# EAGLE board PROIECT_OPEN_READER v77 (EAGLE 9.7.0)
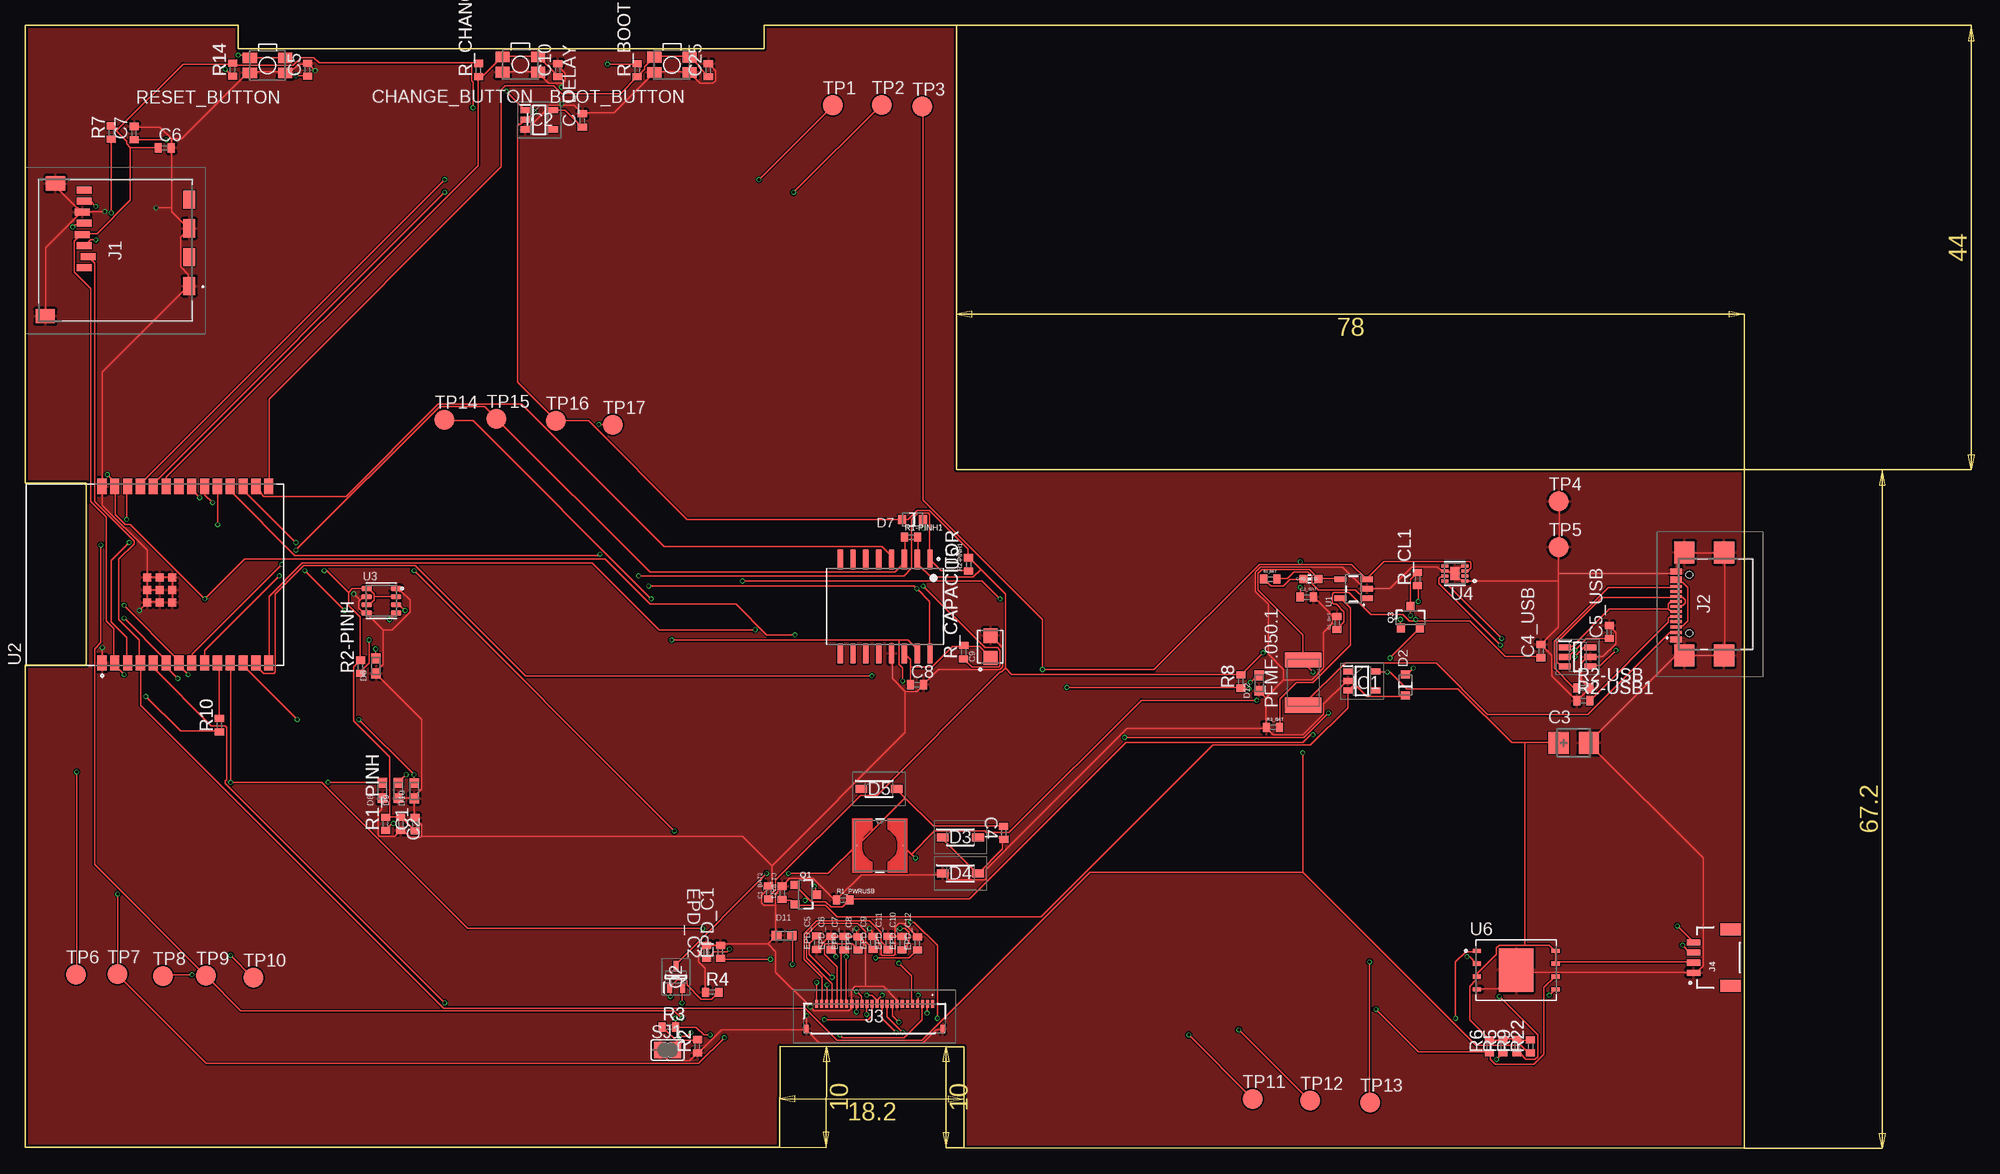
[diagram p0: board, top side]
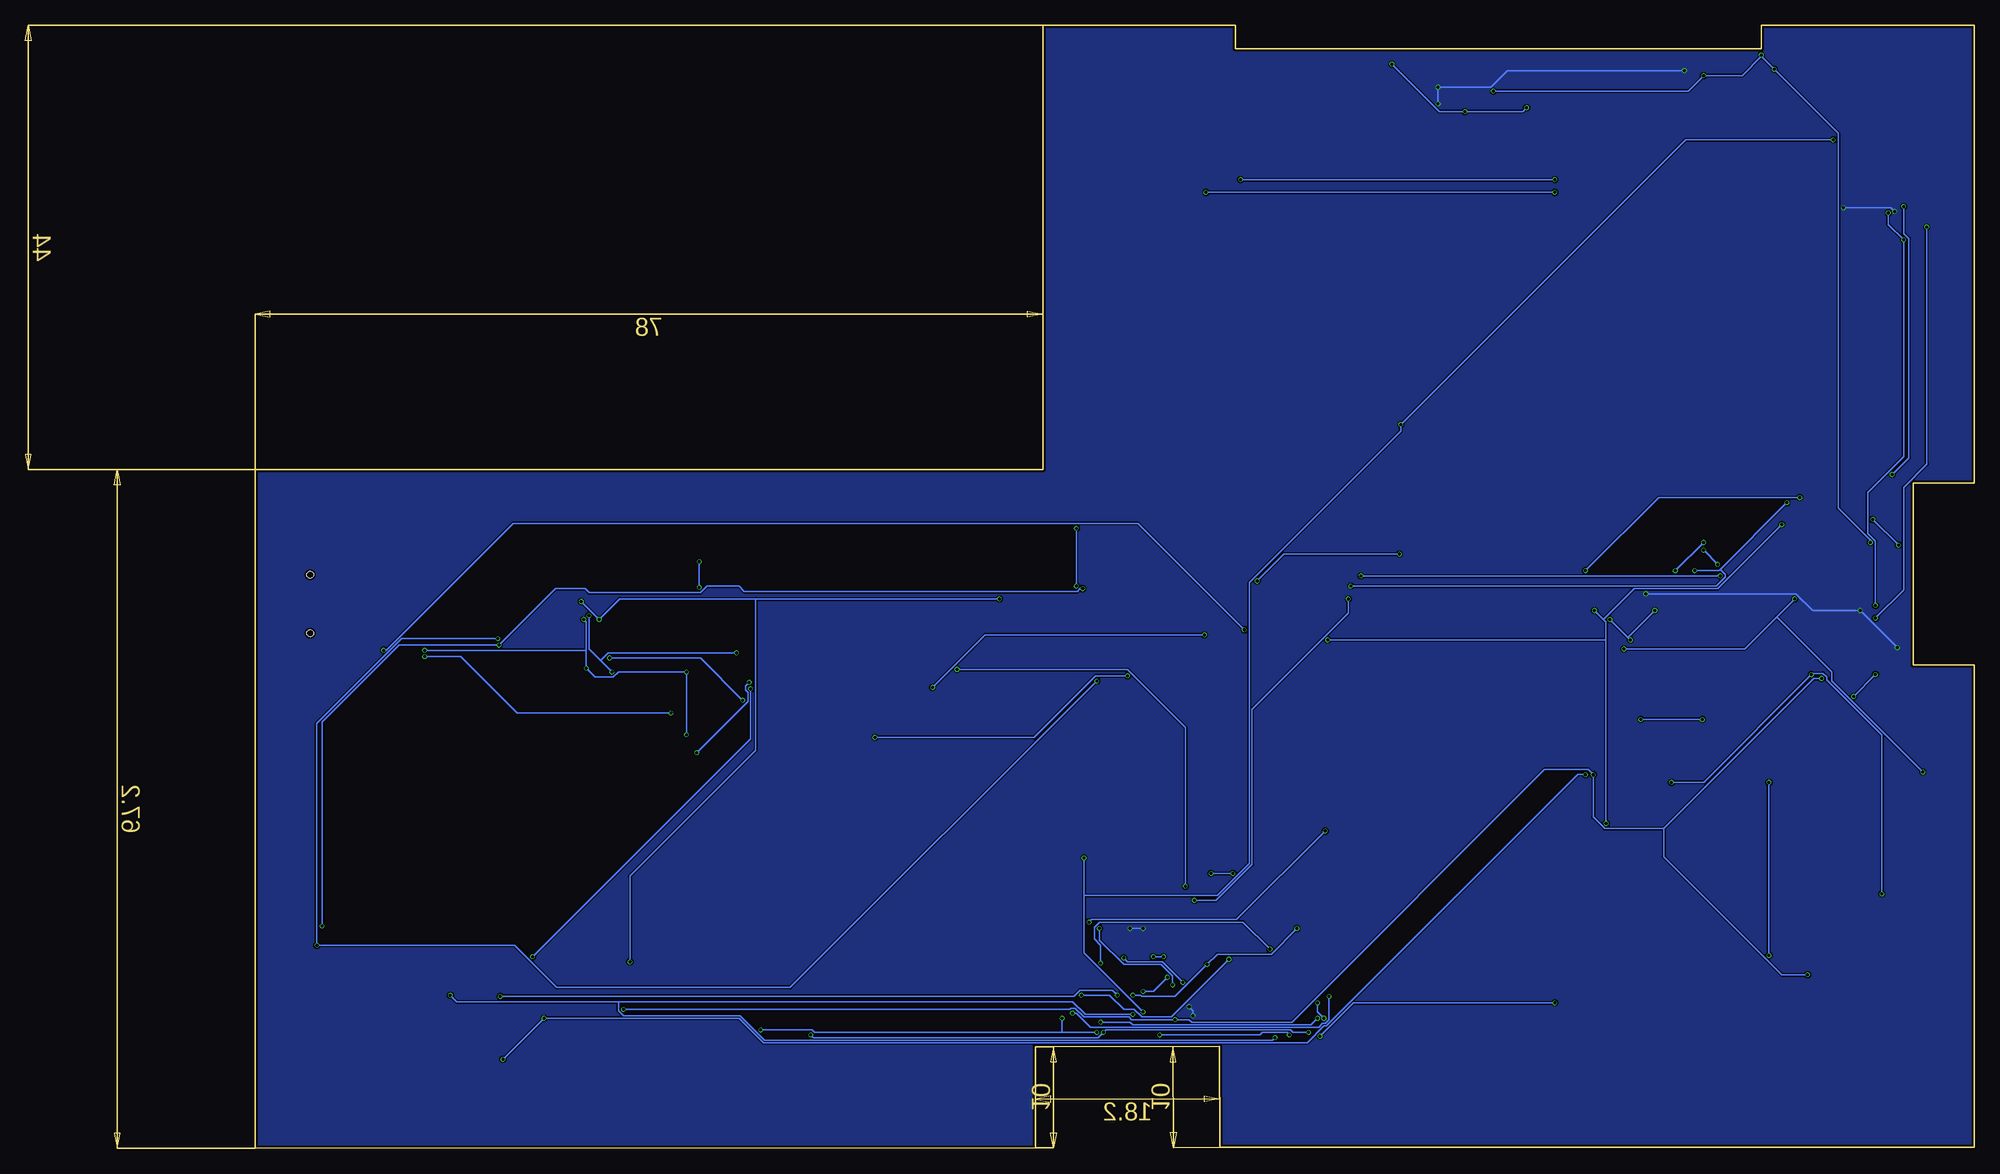
[diagram p1: board, bottom side, seen from below]

Size 170.22 x 111.22 mm. Coordinates in mm from the lower left corner, seen from the top.
Outline: 92.94,10.06 74.73,10.1 74.69,0.1 0.01,0.1 0.01,47.89 6.05,47.89 6.05,65.91 0,65.91 0,111.22 21.06,111.22 21.06,108.88 73.16,108.88 73.16,111.2 92.22,111.2 92.22,67.2 170.22,67.2 170.22,0 92.94,0.06 92.94,10.06
Copper layers (1*16): Top 0.035mm / dielectric 1.6mm / Bottom 0.035mm
Design rules "jlcpcb-2layers.dru": minimum track width 5mil, minimum drill 0.3mm, track to track 5mil, track to pad 5mil, pad to pad 5mil, via to via 5mil, smd to smd 5mil, copper to edge 0.2mm, drill to drill 6mil, minimum pad ring 10mil, minimum via ring 3mil, stop-mask expansion 4mil, vias tented up to drill 0mil, thermal gap 10mil

## Footprints (pad centres in the part's own frame; a part is rotated, then mirrored left to right if it is on the bottom)
MYBUTTON = smd 1.4 x 1.05: 1 1.75,0.75; 2 -1.75,0.75; 3 -1.75,-0.75; 4 1.75,-0.75
EAGLE-LTSPICE_C0402 = smd 0.7 x 0.9: 1 -0.65,0; 2 0.65,0
RCL_CT3528 = smd 2 x 2.2: + -1.5,0; - 1.5,0
CAPCP3225X100N = smd 1.4 x 1.4: 1 -1.1,0; 2 1.1,0
ADAFRUIT_CHIP-LED0603 = smd 0.8 x 0.8: A 0,-0.75; C 0,0.75
SOT95P280X145-6N = smd 1.2 x 0.6: 1 -1.25,0.95; 2 -1.25,0; 3 -1.25,-0.95; 4 1.25,-0.95; 5 1.25,0; 6 1.25,0.95
ESP32_WROVER_AVX---SD0805S020S1R0_AVX_SD0805S020S1R0_0 = smd 0.8 x 0.9: 1 -1.05,0; 2 1.05,0
SOD3716X135N = smd 1.15 x 0.8: 1 -1.75,0; 2 1.75,0
DIOC1608X36N = smd 0.97 x 0.94: 1 -0.75,0; 2 0.75,0
SOT95P280X120-5N = smd 0.9 x 0.6: 1 -1.4,0.95; 2 -1.4,0; 3 -1.4,-0.95; 4 1.4,-0.95; 5 1.4,0.95
SOT95P280X125-5N = smd 0.9 x 0.6: 1 -1.4,0.95; 2 -1.4,0; 3 -1.4,-0.95; 4 1.4,-0.95; 5 1.4,0.95
112ATAARR03ATTEND = smd 1.8 x 1.2: G1 10.6,10.4; G2 4.9,10.4; S1 7.75,10.4; S2 2.05,10.4 | smd 1.4 x 1.9: G3 13.6,-3.85; G4 0.45,-2.85 | smd 0.7 x 1.5: P1 8.8,0; P2 7.7,0.4; P3 6.6,0; P4 5.5,-0.2; P5 4.4,0; P6 3.3,-0.2; P7 2.2,0; P8 1.1,0
SAMACSYS_PARTS_USB4110GFA = smd 0.3 x 1.15: A1 -3.66,3.898; A4 -2.79,3.908; A5 -1.24,3.898; A6 -0.24,3.898; A7 0.26,3.898; A8 1.26,3.898; A9 2.56,3.898; A12 3.36,3.898; B1 3.06,3.898; B4 2.26,3.898; B5 1.76,3.898; B6 0.76,3.898; B7 -0.74,3.898; B8 -1.74,3.898; B9 -2.26,3.898; B12 -3.35,3.898 | smd 2.18 x 2: MP1 -5.11,-0.827; MP2 5.11,-0.827; MP3 -5.11,3.103; MP4 5.11,3.103 | hole 0.65: -2.89,2.603; 2.89,2.603
FH34SRJ24S05SH99 = smd 0.3 x 0.8: 1 5.75,1.45; 2 5.25,1.45; 3 4.75,1.45; 4 4.25,1.45; 5 3.75,1.45; 6 3.25,1.45; 7 2.75,1.45; 8 2.25,1.45; 9 1.75,1.45; 10 1.25,1.45; 11 0.75,1.45; 12 0.25,1.45; 13 -0.25,1.45; 14 -0.75,1.45; 15 -1.25,1.45; 16 -1.75,1.45; 17 -2.25,1.45; 18 -2.75,1.45; 19 -3.25,1.45; 20 -3.75,1.45; 21 -4.25,1.45; 22 -4.75,1.45; 23 -5.25,1.45; 24 -5.75,1.45 | smd 0.4 x 0.8: MP1 6.75,-1.05; MP2 -6.75,-1.05
JST04_1MM_RA = smd 0.6 x 1.35: 1 -1.5,0; 2 -0.5,0; 3 0.5,0; 4 1.5,0 | smd 1.2 x 2: NC1 2.8,-3.675; NC2 -2.8,-3.675
IND_4828-WE-TPC_WRE = smd 0.127 x 0.127: 1 -2.286,0; 2 2.286,0
ESP32C6_VARISTOR_CT/CN1812 = smd 1.5 x 3.6: 1 -2.25,0; 2 2.25,0
ESP32_WROVER_SPARKFUN-DISCRETESEMI_SOT23-3 = smd 0.8 x 0.9: 1 -0.95,-1; 2 0.95,-1; 3 0,1.1
SOT65P210X110-3N = smd 1.05 x 0.5: 1 -1.05,0.65; 2 -1.05,-0.65; 3 1.05,0
ESP32_WROVER_EAGLE-LTSPICE_R0402 = smd 0.7 x 0.9: 1 -0.65,0; 2 0.65,0
SJ = smd 1.168 x 1.6: 1 -0.762,0; 2 0.762,0
TP20R = smd 2 x 2: TP 0,0
ESP32_WROVER_SPARKFUN-IC-POWER_SOT23-5 = smd 0.55 x 1.2: 1 -0.95,-1.3; 2 0,-1.3; 3 0.95,-1.3; 4 0.95,1.3; 5 -0.95,1.3
XCVR_ESP32-C6-WROOM-1-N8 = smd 1.5 x 0.9: 1 -8.75,5.26; 2 -8.75,3.99; 3 -8.75,2.72; 4 -8.75,1.45; 5 -8.75,0.18; 6 -8.75,-1.09; 7 -8.75,-2.36; 8 -8.75,-3.63; 9 -8.75,-4.9; 10 -8.75,-6.17; 11 -8.75,-7.44; 12 -8.75,-8.71; 13 -8.75,-9.98; 14 -8.75,-11.25; 15 8.75,-11.25; 16 8.75,-9.98; 17 8.75,-8.71; 18 8.75,-7.44; 19 8.75,-6.17; 20 8.75,-4.9; 21 8.75,-3.63; 22 8.75,-2.36; 23 8.75,-1.09; 24 8.75,0.18; 25 8.75,1.45; 26 8.75,2.72; 27 8.75,3.99; 28 8.75,5.26 | smd 0.8 x 0.8: 29_1 -2.755,0.79; 29_2 -1.505,0.79; 29_3 -0.255,0.79; 29_4 -2.755,-0.46; 29_5 -1.505,-0.46; 29_6 -0.255,-0.46; 29_7 -2.755,-1.71; 29_8 -1.505,-1.71; 29_9 -0.255,-1.71
ESP32_WROVER_BME680_PSON80P300X300X100-8N = smd 1.016 x 0.5: 1 1.458,1.2; 2 1.458,0.4; 3 1.458,-0.4; 4 1.458,-1.2; 5 -1.458,-1.22; 6 -1.458,-0.4; 7 -1.458,0.4; 8 -1.458,1.2
SON50P200X200X80-9N = smd 0.76 x 0.27: 1 -0.985,0.75; 2 -0.985,0.25; 3 -0.985,-0.25; 4 -0.985,-0.75; 5 0.985,-0.75; 6 0.985,-0.25; 7 0.985,0.25; 8 0.985,0.75 | smd 0.9 x 1.3: 9 0,0
SOIC127P1032X265-16N = smd 2.05 x 0.59: 1 -4.655,4.445; 2 -4.655,3.175; 3 -4.655,1.905; 4 -4.655,0.635; 5 -4.655,-0.635; 6 -4.655,-1.905; 7 -4.655,-3.175; 8 -4.655,-4.445; 9 4.655,-4.445; 10 4.655,-3.175; 11 4.655,-1.905; 12 4.655,-0.635; 13 4.655,0.635; 14 4.655,1.905; 15 4.655,3.175; 16 4.655,4.445
SON127P600X800X80-9N = smd 0.94 x 0.44: 1 -3.895,1.905; 2 -3.895,0.635; 3 -3.895,-0.635; 4 -3.895,-1.905; 5 3.895,-1.905; 6 3.895,-0.635; 7 3.895,0.635; 8 3.895,1.905 | smd 3.4 x 4.3: 9 0,0

## Placement (x,y rotation side)
BOOT_BUTTON  BUTTON_CUSYOMV1  [MYBUTTON]  64.03,107.31 180 top
C1  [EAGLE-LTSPICE_C0402]  38.59,32.1 90 top
C1_BAT  4.7uF  [EAGLE-LTSPICE_C0402]  129.87,52.02 90 top
C1_BAT1  [EAGLE-LTSPICE_C0402]  74.94,25.32 90.1 top
C1_BAT2  [EAGLE-LTSPICE_C0402]  73.61,25.34 90 top
C2  [EAGLE-LTSPICE_C0402]  37.18,32.12 270 top
C2_BAT  4.7uF  [EAGLE-LTSPICE_C0402]  126.87,54.59 0 top
C3  [RCL_CT3528]  153.3,40.15 0 top
C4  4.7uF/25V  [EAGLE-LTSPICE_C0402]  96.87,31.25 90.7 top
C4_USB  100nF  [EAGLE-LTSPICE_C0402]  150.06,49.24 90 top
C5  1uF  [EAGLE-LTSPICE_C0402]  27.95,106.8 90 top
C5_USB  4.7uF  [EAGLE-LTSPICE_C0402]  156.82,51.15 90 top
C6  100nF  [EAGLE-LTSPICE_C0402]  13.82,99.07 0 top
C7  10uF  [EAGLE-LTSPICE_C0402]  10.77,100.55 90 top
C8  100nF  [EAGLE-LTSPICE_C0402]  88.3,45.92 0 top
C9  CPH3225A  [CAPCP3225X100N]  95.55,49.67 90 top
C10  100nF  [EAGLE-LTSPICE_C0402]  52.73,106.78 90 top
C25  100nF  [EAGLE-LTSPICE_C0402]  67.63,106.76 90 top
C_DELAY  100nF  [EAGLE-LTSPICE_C0402]  55.16,101.79 90 top
CHANGE_BUTTON  BUTTON_CUSYOMV1  [MYBUTTON]  49.01,107.32 180 top
CHG_LED  [ADAFRUIT_CHIP-LED0603]  127.3,56.37 90 top
D1  USBLC6-2SC6Y  [SOT95P280X145-6N]  153.69,48.67 0 top
D2  ESP32_WROVER_AVX---SD0805S020S1R0_AVX_SD0805S020S1R0_0_0AVX_SD0805S020S1R0_0_0  [ESP32_WROVER_AVX---SD0805S020S1R0_AVX_SD0805S020S1R0_0]  136.64,45.89 90 top
D3  MBR0530  [SOD3716X135N]  92.58,30.81 0 top
D4  MBR0530  [SOD3716X135N]  92.58,27.23 0 top
D5  MBR0530  [SOD3716X135N]  84.53,35.61 0 top
D6  PGB1010603MR  [DIOC1608X36N]  34.72,47.77 90 top
D7  ESP32_WROVER_AVX---SD0805S020S1R0_AVX_SD0805S020S1R0_0_0AVX_SD0805S020S1R0_0_0  [ESP32_WROVER_AVX---SD0805S020S1R0_AVX_SD0805S020S1R0_0]  87.84,62.26 180 top
D8  PGB1010603MR  [DIOC1608X36N]  35.38,35.43 90 top
D9  PGB1010603MR  [DIOC1608X36N]  36.94,35.43 90 top
D10  PGB1010603MR  [DIOC1608X36N]  38.51,35.41 90 top
D11  PGB1010603MR  [DIOC1608X36N]  75.14,21.08 0 top
D12  PGB1010603MR  [DIOC1608X36N]  122.16,46.07 90 top
EPD_C1  1uF/50V  [EAGLE-LTSPICE_C0402]  68.82,19.47 90 top
EPD_C2  1uF/50V  [EAGLE-LTSPICE_C0402]  67.44,19.46 90.4 top
EPD_C5  0.1uF/50V  [EAGLE-LTSPICE_C0402]  78.36,20.38 90 top
EPD_C6  1uF/50V  [EAGLE-LTSPICE_C0402]  79.77,20.34 90 top
EPD_C7  1uF/50V  [EAGLE-LTSPICE_C0402]  81.09,20.33 90 top
EPD_C8  1uF/50V  [EAGLE-LTSPICE_C0402]  82.46,20.31 90 top
EPD_C9  1uF/50V  [EAGLE-LTSPICE_C0402]  83.93,20.36 90 top
EPD_C10  1uF/50V  [EAGLE-LTSPICE_C0402]  86.82,20.33 90 top
EPD_C11  1uF/50V  [EAGLE-LTSPICE_C0402]  85.43,20.34 90 top
EPD_C12  1uF/50V  [EAGLE-LTSPICE_C0402]  88.32,20.3 90 top
IC1  XC6220A331MR-G  [SOT95P280X120-5N]  132.34,46.28 0 top
IC2  BD5229G-TR  [SOT95P280X125-5N]  50.89,101.85 0 top
J1  112A-TAAR-R03_ATTEND  [112ATAARR03ATTEND]  5.83,96 270 top
J2  SAMACSYS_PARTS_USB4110-GF-A  [SAMACSYS_PARTS_USB4110GFA]  167.35,53.9 90 top
J3  FH34SRJ-24S-0.5SH_99_  [FH34SRJ24S05SH99]  84.08,12.87 0 top
J4  QWIIC_RIGHT_ANGLE  [JST04_1MM_RA]  165.17,18.9 90 top
L1  68uH  [IND_4828-WE-TPC_WRE]  84.61,29.98 0 top
PFMF.050.1  [ESP32C6_VARISTOR_CT/CN1812]  126.52,46.13 90 top
Q1  20V/4.2A/52mΩ/1.4W  [ESP32_WROVER_SPARKFUN-DISCRETESEMI_SOT23-3]  77.23,25.13 270 top
Q2  SI1308EDL-T1-GE3  [SOT65P210X110-3N]  64.42,16.98 90 top
Q3  20V/4.2A/52mΩ/1.4W  [ESP32_WROVER_SPARKFUN-DISCRETESEMI_SOT23-3]  137.14,52.55 0 top
R1-PINH1  10K  [ESP32_WROVER_EAGLE-LTSPICE_R0402]  87.71,60.54 0 top
R1_BAT  200  [ESP32_WROVER_EAGLE-LTSPICE_R0402]  123.26,56.38 0 top
R1_PINH  10K  [ESP32_WROVER_EAGLE-LTSPICE_R0402]  35.67,32.13 90 top
R1_PWRUSB  100K  [ESP32_WROVER_EAGLE-LTSPICE_R0402]  80.98,24.61 0 top
R2  2.2  [ESP32_WROVER_EAGLE-LTSPICE_R0402]  66.55,10.13 90 top
R2-PINH  10K  [ESP32_WROVER_EAGLE-LTSPICE_R0402]  33.19,47.69 90 top
R2-PINH1  10K  [ESP32_WROVER_EAGLE-LTSPICE_R0402]  93.39,57.84 90 top
R2-USB  5K1  [ESP32_WROVER_EAGLE-LTSPICE_R0402]  154.27,45.6 0 top
R2-USB1  5k1  [ESP32_WROVER_EAGLE-LTSPICE_R0402]  154.25,44.33 0 top
R2_BAT  2K  [ESP32_WROVER_EAGLE-LTSPICE_R0402]  123.52,41.7 0 top
R3  0.47  [ESP32_WROVER_EAGLE-LTSPICE_R0402]  63.72,12.02 0 top
R4  10K  [ESP32_WROVER_EAGLE-LTSPICE_R0402]  68.02,15.46 0 top
R5  [ESP32_WROVER_EAGLE-LTSPICE_R0402]  146.31,10.13 90 top
R6  [ESP32_WROVER_EAGLE-LTSPICE_R0402]  144.95,10.12 90 top
R7  [ESP32_WROVER_EAGLE-LTSPICE_R0402]  8.53,100.6 90 top
R8  [ESP32_WROVER_EAGLE-LTSPICE_R0402]  120.35,46.22 90 top
R9  [ESP32_WROVER_EAGLE-LTSPICE_R0402]  147.68,10.14 90 top
R10  R1  [ESP32_WROVER_EAGLE-LTSPICE_R0402]  19.23,41.91 90 top
R14  [ESP32_WROVER_EAGLE-LTSPICE_R0402]  20.52,106.81 90 top
R22  [ESP32_WROVER_EAGLE-LTSPICE_R0402]  149.03,10.12 90 top
R_BOOT  10K  [ESP32_WROVER_EAGLE-LTSPICE_R0402]  60.58,106.77 90 top
R_CAPACITOR  15  [ESP32_WROVER_EAGLE-LTSPICE_R0402]  92.91,49.13 89.3 top
R_CHANGE  10K  [ESP32_WROVER_EAGLE-LTSPICE_R0402]  44.87,106.78 90 top
R_CL1  10K  [ESP32_WROVER_EAGLE-LTSPICE_R0402]  137.84,56.39 90 top
RESET_BUTTON  BUTTON_CUSYOMV1  [MYBUTTON]  23.99,107.24 180 top
SJ1  [SJ]  63.6,9.74 0 top
TP1  TPTP20R  [TP20R]  79.96,103.3 0 top
TP2  TPTP20R  [TP20R]  84.79,103.33 0 top
TP3  TPTP20R  [TP20R]  88.82,103.16 0 top
TP4  TPTP20R  [TP20R]  151.82,64.07 0 top
TP5  TPTP20R  [TP20R]  151.82,59.55 0 top
TP6  TPTP20R  [TP20R]  5.04,17.23 0 top
TP7  TPTP20R  [TP20R]  9.12,17.25 0 top
TP8  TPTP20R  [TP20R]  13.61,17.08 0 top
TP9  TPTP20R  [TP20R]  17.9,17.1 0 top
TP10  TPTP20R  [TP20R]  22.58,16.92 0 top
TP11  TPTP20R  [TP20R]  121.51,4.9 0 top
TP12  TPTP20R  [TP20R]  127.22,4.72 0 top
TP13  TPTP20R  [TP20R]  133.14,4.54 0 top
TP14  TPTP20R  [TP20R]  41.52,72.17 0 top
TP15  TPTP20R  [TP20R]  46.66,72.25 0 top
TP16  TPTP20R  [TP20R]  52.54,72.07 0 top
TP17  TPTP20R  [TP20R]  58.17,71.65 0 top
U1  [ESP32_WROVER_SPARKFUN-IC-POWER_SOT23-5]  131.51,55.41 90 top
U2  ESP32-C6-WROOM-1-N8  [XCVR_ESP32-C6-WROOM-1-N8]  12.86,56.81 90 top
U3  ESP32_WROVER_BME680_BME680  [ESP32_WROVER_BME680_PSON80P300X300X100-8N]  35.26,54.23 0 top
U4  MAX17048G+T10  [SON50P200X200X80-9N]  141.55,56.93 180 top
U5  DS3231SN#  [SOIC127P1032X265-16N]  85.13,53.67 270 top
U6  W25Q512JVEIQ  [SON127P600X800X80-9N]  147.61,17.66 0 top

## Library data of the parts
BOOT_BUTTON CHANGE_BUTTON CHG_LED PFMF.050.1 RESET_BUTTON SJ1 TP1-TP17 = DeskAssistant v19 v1
C1 C1_BAT C1_BAT1 C1_BAT2 C2 C2_BAT C4 C4_USB C5 C5_USB C6-C8 C10 C25 C_DELAY EPD_C1 EPD_C2 EPD_C5-EPD_C12 = DeskAssistant v19 v1; SPICEMODEL: NONE; SPICEPREFIX: C
C3 = DeskAssistant v19 v1; SPICEPREFIX: C
C9 = DeskAssistant v19 v1; AVAILABILITY: Not in stock; CHECK_PRICES: https://www.snapeda.com/parts/CPH3225A/Seiko+Instruments/view-part/?ref=eda; DESCRIPTION: 11 mF (EDLC) Supercapacitor 3.3 V 1210 (3225 Metric) - -; MF: Seiko Instruments; MP: CPH3225A; PACKAGE: 1210 Seiko; PRICE: None; PURCHASE-URL: https://www.snapeda.com/api/url_track_click_mouser/?unipart_id=562593&manufacturer=Seiko Instruments&part_name=CPH3225A&search_term=None; SNAPEDA_LINK: https://www.snapeda.com/parts/CPH3225A/Seiko+Instruments/view-part/?ref=snap
D1 = DeskAssistant v19 v1; AVAILABILITY: In Stock; CHECK_PRICES: https://www.snapeda.com/parts/USBLC6-2SC6Y/STMicroelectronics/view-part/?ref=eda; DESCRIPTION: 17V Clamp 5A (8/20µs) Ipp Tvs Diode Surface Mount SOT-23-6; MF: STMicroelectronics; MP: USBLC6-2SC6Y; PACKAGE: SOT-23-6 STMicroelectronics; PRICE: None; SNAPEDA_LINK: https://www.snapeda.com/parts/USBLC6-2SC6Y/STMicroelectronics/view-part/?ref=snap
D2 D7 = DeskAssistant v19 v1; CENTROID_NOT_SPECIFIED: No; DATASHEET: http://datasheets.avx.com/schottky.pdf; DIGIKEY_DESCRIPTION: DIODE SCHOTTKY 20V 1A 0805; DIGIKEY_PART_NUMBER: 478-7800-1-ND; LEAD_FREE: yes; MF: AVX; MOUSER_PART_NUMBER: 581-SD0805S020S1R0; PACKAGE: 0805 (2012 metric); PREFIX: D; ROHS: yes; TEMPERATURE_RANGE_HIGH: +125°C; TEMPERATURE_RANGE_LOW: -55°C
D3-D5 = DeskAssistant v19 v1; AVAILABILITY: In Stock; CHECK_PRICES: https://www.snapeda.com/parts/MBR0530/Onsemi/view-part/?ref=eda; DESCRIPTION: Diode Schottky 30 V 500mA Surface Mount SOD-123; MF: ON Semiconductor; MP: MBR0530; PACKAGE: SOD-123-2 ON Semiconductor; PRICE: None; PURCHASE-URL: https://www.snapeda.com/api/url_track_click_mouser/?unipart_id=179458&manufacturer=ON Semiconductor&part_name=MBR0530&search_term=None; SNAPEDA_LINK: https://www.snapeda.com/parts/MBR0530/Onsemi/view-part/?ref=snap
D6 D8-D12 = DeskAssistant v19 v1; AVAILABILITY: In Stock; CHECK_PRICES: https://www.snapeda.com/parts/PGB1010603MR/Littelfuse/view-part/?ref=eda; DESCRIPTION: 150V (Typ) Clamp - Ipp Tvs Diode Surface Mount 0603 (1608 Metric); MF: Littelfuse Inc.; MP: PGB1010603MR; PACKAGE: 0603 Littelfuse Inc.; PRICE: None; PURCHASE-URL: https://www.snapeda.com/api/url_track_click_mouser/?unipart_id=5659453&manufacturer=Littelfuse Inc.&part_name=PGB1010603MR&search_term=None; SNAPEDA_LINK: https://www.snapeda.com/parts/PGB1010603MR/Littelfuse/view-part/?ref=snap
IC1 = DeskAssistant v19 v1; DESCRIPTION: LDO Voltage Regulators; HEIGHT: 1.2mm; MANUFACTURER_NAME: Torex; MANUFACTURER_PART_NUMBER: XC6220A331MR-G; MOUSER_PART_NUMBER: 865-XC6220A331MR-G; MOUSER_PRICE-STOCK: https://www.mouser.co.uk/ProductDetail/Torex-Semiconductor/XC6220A331MR-G?qs=AsjdqWjXhJ8ZSWznL1J0gg%3D%3D
IC2 = DeskAssistant v19 v1; DESCRIPTION: Voltage Detector with Adjustable Delay Time: CMOS processes are utilized to develop high precision, low current consumption CMOS reset ICs that allow arbitrary setting of the delay time. The extensive lineup includes both Nch Open Drain and CMOS output types in a wide range of detection voltages (from 2.3V to 6.0V, in 0.1V steps), enabling selection of the ideal solution based on customer requirements. In addition, the entire series is of course both lead-free and RoHS-compliant.; HEIGHT: 1.25mm; MANUFACTURER_NAME: ROHM Semiconductor; MANUFACTURER_PART_NUMBER: BD5229G-TR; MOUSER_PART_NUMBER: 755-BD5229G-TR; MOUSER_PRICE-STOCK: https://www.mouser.co.uk/ProductDetail/ROHM-Semiconductor/BD5229G-TR?qs=4kLU8WoGk0vvnhrrYwdszw%3D%3D
J1 = DeskAssistant v19 v1; DESCRIPTION: Micro SD Card Socket, Push-Push Type, Top Mount, SMT, H=1.83mm, 10u; HEIGHT: 1.9mm; MANUFACTURER_NAME: ATTEND; MANUFACTURER_PART_NUMBER: 112A-TAAR-R03 ATTEND
J2 = DeskAssistant v19 v1; DESCRIPTION: CONN USB 2.0 TYPE-C R/A SMT; HEIGHT: 3.26mm; MANUFACTURER_NAME: GCT (GLOBAL CONNECTOR TECHNOLOGY); MANUFACTURER_PART_NUMBER: USB4110-GF-A; MOUSER_PART_NUMBER: 640-USB4110-GF-A; MOUSER_PRICE-STOCK: https://www.mouser.co.uk/ProductDetail/GCT/USB4110-GF-A?qs=KUoIvG%2F9IlYiZvIXQjyJeA%3D%3D
J3 = DeskAssistant v19 v1; DESCRIPTION: 24 Position FFC, FPC Connector Contacts, Top and Bottom 0.020" (0.50mm) Surface Mount, Right Angle; HEIGHT: 1.1mm; MANUFACTURER_NAME: Hirose; MANUFACTURER_PART_NUMBER: FH34SRJ-24S-0.5SH(99); MOUSER_PART_NUMBER: 798-FH34SRJ24S05SH99; MOUSER_PRICE-STOCK: https://www.mouser.co.uk/ProductDetail/Hirose-Connector/FH34SRJ-24S-0.5SH99?qs=vcbW%252B4%252BSTIpKBl5ap9J8Fw%3D%3D
J4 = DeskAssistant v19 v1; PROD_ID: CONN-13694
L1 = DeskAssistant v19 v1; COPYRIGHT: Copyright (C) 2024 Ultra Librarian. All rights reserved.; MANUFACTURER_PART_NUMBER: 744043680; MFR_NAME: Wurth Electronics
Q1 Q3 = DeskAssistant v19 v1; PROD_ID: TRAN-14388
Q2 = DeskAssistant v19 v1; AVAILABILITY: In Stock; CHECK_PRICES: https://www.snapeda.com/parts/SI1308EDL-T1-GE3/Vishay+Siliconix/view-part/?ref=eda; DESCRIPTION: Si1308EDL-T1-GE3 N-channel MOSFET Transistor, 1.5 A, 30 V, 3-Pin SC-70 | Siliconix / Vishay SI1308EDL-T1-GE3; MF: Vishay Siliconix; MP: SI1308EDL-T1-GE3; PACKAGE: SOT-323 Vishay Semiconductor; PRICE: None; PURCHASE-URL: https://www.snapeda.com/api/url_track_click_mouser/?unipart_id=274603&manufacturer=Vishay Siliconix&part_name=SI1308EDL-T1-GE3&search_term=None; SNAPEDA_LINK: https://www.snapeda.com/parts/SI1308EDL-T1-GE3/Vishay+Siliconix/view-part/?ref=snap
R1-PINH1 R1_BAT R1_PINH R1_PWRUSB R2 R2-PINH R2-PINH1 R2-USB R2-USB1 R2_BAT R3-R10 R14 R22 R_BOOT R_CAPACITOR R_CHANGE R_CL1 = DeskAssistant v19 v1; SPICEMODEL: NONE; SPICEPREFIX: R
U1 = DeskAssistant v19 v1; PROD_ID: IC-09995
U2 = DeskAssistant v19 v1; AVAILABILITY: In Stock; CHECK_PRICES: https://www.snapeda.com/parts/ESP32-C6-WROOM-1-N8/Espressif+Systems/view-part/?ref=eda; DESCRIPTION: Multiprotocol Modules ESP32-C6 module, Wi-Fi 6 in 2.4 GHz band, Bluetooth 5, Zigbee 3.0 and Thread. ESP34-WROOM Compatible - ENGINEERING SAMPLE; MF: Espressif Systems; MP: ESP32-C6-WROOM-1-N8; PACKAGE: None; PRICE: None; SNAPEDA_LINK: https://www.snapeda.com/parts/ESP32-C6-WROOM-1-N8/Espressif+Systems/view-part/?ref=snap
U3 = DeskAssistant v19 v1; AVAILABILITY: Unavailable; DESCRIPTION: Integrated Environmental Unit; MF: Bosch Sensortec; MP: BME680; PACKAGE: LGA-8 Bosch Tools; PRICE: None
U4 = DeskAssistant v19 v1; AVAILABILITY: In Stock; CHECK_PRICES: https://www.snapeda.com/parts/MAX17048G+T10/Analog+Devices/view-part/?ref=eda; DESCRIPTION: 3µA 1-Cell/2-Cell Fuel Gauge with ModelGauge; MF: Analog Devices; MP: MAX17048G+T10; PACKAGE: TDFN-8 Maxim; PRICE: None; PURCHASE-URL: https://www.snapeda.com/api/url_track_click_mouser/?unipart_id=329239&manufacturer=Analog Devices&part_name=MAX17048G+T10&search_term=None; SNAPEDA_LINK: https://www.snapeda.com/parts/MAX17048G+T10/Analog+Devices/view-part/?ref=snap
U5 = DeskAssistant v19 v1; AVAILABILITY: In Stock; CHECK_PRICES: https://www.snapeda.com/parts/DS3231SN%23/Analog+Devices/view-part/?ref=eda; DESCRIPTION: Extremely Accurate I²C-Integrated RTC/TCXO/Crystal; MF: Analog Devices; MP: DS3231SN#; PACKAGE: SOIC-16 Maxim; PRICE: None; PURCHASE-URL: https://www.snapeda.com/api/url_track_click_mouser/?unipart_id=99048&manufacturer=Analog Devices&part_name=DS3231SN#&search_term=None; SNAPEDA_LINK: https://www.snapeda.com/parts/DS3231SN%23/Analog+Devices/view-part/?ref=snap
U6 = DeskAssistant v19 v1; AVAILABILITY: In Stock; CHECK_PRICES: https://www.snapeda.com/parts/W25Q512JVEIQ/Winbond+Electronics/view-part/?ref=eda; DESCRIPTION: FLASH - NOR Memory IC 512Mb (64M x 8) SPI - Quad I/O 133 MHz 8-WSON (8x6); MF: Winbond Electronics; MP: W25Q512JVEIQ; PACKAGE: Package; PRICE: None; SNAPEDA_LINK: https://www.snapeda.com/parts/W25Q512JVEIQ/Winbond+Electronics/view-part/?ref=snap

## Nets
3V3: C1_BAT2.1 C3.+ C6.1 D7.2 IC1.5 IC2.2 J1.P4 J4.2 Q3.3 R1-PINH1.2 R2-PINH1.2 R5.2 R6.2 R7.2 R8.2 R9.2 R10.1 R14.2 R22.2 R_BOOT.2 R_CHANGE.2 R_CL1.2 TP16.TP U2.2 U5.2 U6.3 U6.7 U6.8
32KHZ: R2-PINH1.1 U2.9 U5.1
DN: D1.1 J2.A7 J2.B7
DP: D1.3 J2.A6 J2.B6
EPD_3V3: C7.1 J3.16 L1.2 Q3.2 TP17.TP
EPD_3V3_C: Q3.1 R_CL1.1 TP13.TP U2.18
EPD_BUSY: J3.9 TP9.TP U2.26
EPD_CS: D11.2 J3.12 R9.1 TP10.TP U2.11
EPD_DC: J3.11 TP11.TP U2.5
EPD_RST: J3.10 TP12.TP U2.21
FLASH_CS: D10.2 R5.1 U2.12 U6.1
GDR: J3.2 Q2.1 R4.2
GND: BOOT_BUTTON.1 BOOT_BUTTON.2 C1.2 C1_BAT1.2 C1_BAT2.2 C1_BAT.2 C2.2 C2_BAT.2 C3.- C4_USB.2 C5.2 C5_USB.2 C6.2 C7.2 C8.2 C9.2 C10.2 C25.2 C_DELAY.2 CHANGE_BUTTON.1 CHANGE_BUTTON.2 D1.5 D4.1 D6.1 D8.1 D9.1 D10.1 D11.1 D12.1 EPD_C1.2 EPD_C2.2 EPD_C5.1 EPD_C6.2 EPD_C7.2 EPD_C8.2 EPD_C9.2 EPD_C10.2 EPD_C11.2 EPD_C12.2 IC1.2 IC2.3 J1.G1 J1.G2 J1.G3 J1.G4 J1.P6 J2.A1 J2.A12 J2.B1 J2.B12 J2.MP1 J2.MP2 J2.MP3 J2.MP4 J3.8 J3.17 J3.MP1 J3.MP2 J4.1 R1_PWRUSB.1 R2-USB1.1 R2-USB.2 R2.1 R2_BAT.1 R4.1 RESET_BUTTON.1 RESET_BUTTON.2 SJ1.1 TP4.TP TP5.TP U1.2 U2.1 U2.28 U2.29_1 U2.29_2 U2.29_3 U2.29_4 U2.29_5 U2.29_6 U2.29_7 U2.29_8 U2.29_9 U3.1 U3.5 U3.7 U4.1 U4.4 U4.6 U4.9 U5.13 U6.4 U6.9
GPIO8: R10.2 U2.10
I2C_PW: C1.1 C2.1 R1_PINH.2 R2-PINH.2 U2.17 U3.2 U3.6 U3.8
INT_RTC: R1-PINH1.1 TP15.TP U2.8 U5.3
IO/BOOT: BOOT_BUTTON.3 BOOT_BUTTON.4 C25.1 R_BOOT.1 U2.15
IO/CHANGE: C10.1 CHANGE_BUTTON.3 CHANGE_BUTTON.4 R_CHANGE.1 U2.23
MISO: D6.2 J1.P7 R8.1 TP6.TP U2.27 U6.2
MOSI: D8.2 J1.P3 J3.14 R7.1 TP7.TP U2.7 U6.5
N$1: J2.A4 PFMF.050.1.1
N$2: J2.A5 R2-USB1.2
N$3: J2.B5 R2-USB.1
N$4: C1_BAT1.1 D2.1 IC1.1 IC1.3 Q1.2
N$5: EPD_C12.1 J3.24
N$6: EPD_C11.1 J3.23
N$7: C4.1 D3.1 D4.2
N$8: R2_BAT.2 U1.5
N$9: EPD_C10.1 J3.22
N$10: EPD_C9.1 J3.21
N$11: CHG_LED.C R1_BAT.1
N$12: R1_BAT.2 U1.1
N$13: EPD_C8.1 J3.20
N$14: EPD_C7.1 J3.19
N$15: EPD_C6.1 J3.18
N$16: C_DELAY.1 IC2.5
N$17: EPD_C5.2 J3.15
N$18: EPD_C2.1 J3.5
N$19: EPD_C1.1 J3.4
N$21: D7.1 R_CAPACITOR.1
PREVGH: D5.1
PREVGL: D3.2
RESE: J3.3 Q2.2 R3.2
RESE': R2.2 R3.1 SJ1.2
RESET: C5.1 IC2.1 R14.1 RESET_BUTTON.3 RESET_BUTTON.4 U2.3
RTC_RST: U2.16 U5.4
RX: TP2.TP U2.24
SCK: D9.2 J1.P5 J3.13 R6.1 TP8.TP U2.6 U6.6
SCL: J4.4 R2-PINH.1 U2.20 U3.4 U4.7 U5.16
SDA: J4.3 R1_PINH.1 U2.19 U3.3 U4.8 U5.15
SRC: C4.2 D5.2 L1.1 Q2.3
SS_SD: D12.2 J1.P2 R22.1 U2.4
TX: TP1.TP U2.25
USB_D+: D1.4 U2.14
USB_D-: D1.6 U2.13
VBAT: C2_BAT.1 Q1.3 TP3.TP U1.3 U4.2 U4.3
VBUS: C1_BAT.1 C4_USB.1 C5_USB.1 CHG_LED.A D1.2 D2.2 PFMF.050.1.2 Q1.1 R1_PWRUSB.2 TP14.TP U1.4
VRTC: C8.1 C9.1 R_CAPACITOR.2 U5.14
VUSB: J2.A9 J2.B4 J2.B9

## Tracks (layer width: path | path; a pad name or v marks a point on that pad's centre or on a via)
3V3  (via drill 0.3)
  Top 0.127: v57.66,107.37 60.58,107.37 R_BOOT.2 | v50.42,102.67 49.53,101.78 IC2.2 49.4,101.78 49.02,101.4 48.89,101.4 48.77,101.27 48.77,75.87 52.45,72.19 TP16.TP 52.58,72.06 55.75,72.06 65.53,62.28 86.74,62.28 D7.2 86.87,62.28 87.38,62.28 88.27,63.17 89.53,63.17 93.34,59.36 93.34,58.6 R2-PINH1.2 93.47,58.47 94.61,57.33 | v11.94,44.76 15.37,41.33 19.18,41.33 R10.1 | v9.78,46.92 8.76,47.93 U2.2 8.76,48.06 8.76,51.49 8,52.25 8,62.54 6.48,64.06 6.48,85.14 4.83,86.79 4.83,89.84 5.59,90.6 J1.P4 5.71,90.6 7.11,90.6 10.41,93.91 10.41,99.11 | 9.02,100.76 10.03,99.75 10.03,99.49 10.41,99.11 | 9.02,100.76 8.64,101.14 R7.2 | 10.41,99.11 13.08,99.11 C6.1 | 9.02,100.76 15.62,107.37 20.45,107.37 R14.2 20.57,107.37 20.7,107.24 26.54,107.24 27.3,108 28.57,108 29.08,107.49 44.2,107.49 | 44.2,107.49 44.83,107.49 R_CHANGE.2 | v44.32,103.05 44.32,105.59 44.2,105.72 44.2,107.49 | R22.2 148.97,10.72 147.7,10.72 R9.2 147.57,10.85 146.43,10.85 R5.2 146.3,10.72 145.03,10.72 R6.2 144.91,10.85 143,12.75 143,16.05 143.64,16.69 143.64,16.94 U6.3 143.76,17.07 143.76,17.33 145.67,19.23 145.67,19.87 145.92,20.12 148.46,20.12 | 151.51,18.47 151.51,19.48 U6.8 151.38,19.61 150.88,20.12 148.46,20.12 | 151.51,18.47 151.51,18.34 U6.7 151.51,18.47 | 151.51,18.47 165.1,18.47 J4.2 | R_CL1.2 137.8,56.95 137.16,56.31 137.16,53.77 Q3.3 137.16,53.65 v137.16,52.76 | 148.46,40.19 151.76,40.19 C3.+ | 148.46,40.19 147.19,40.19 141.86,45.52 136.78,45.52 135.13,47.17 v134.87,47.17 133.86,47.17 IC1.5 | 148.46,40.19 148.46,20.12 | R1-PINH1.2 88.39,60.51 88.39,58.35 U5.2 88.39,58.22 88.39,57.84 89.66,56.57 93.85,56.57 94.61,57.33
  Top 0.127: 97.03,47.55 96.65,47.17 96.52,47.17 84.33,34.98 82.68,34.98 74.3,26.6 74.3,25.58 73.66,24.95 73.66,24.69 C1_BAT2.1 | 97.03,47.55 97.03,54.92 94.61,57.33 | 97.03,47.55 97.66,46.92 120.27,46.92 R8.2 v122.55,49.08
  Bottom 0.127: v57.66,107.37 52.96,102.67 v50.42,102.67 44.7,102.67 v44.32,103.05 | v9.78,46.92 v11.94,44.76 | v137.16,52.76 137.16,49.46 136.02,48.31 | v134.87,47.17 136.02,48.31 | 136.02,48.31 135.25,49.08 v122.55,49.08
32KHZ  (via drill 0.3)
  Top 0.127: R2-PINH1.1 93.34,57.2 90.68,57.2 89.66,58.22 U5.1 89.53,58.35 89.53,62.79 89.41,62.92 88.39,62.92 87.76,62.28 87.76,57.46 86.99,56.7 v60.71,56.7 | v25.15,56.7 17.78,49.33 17.78,48.06 U2.9
  Bottom 0.127: v60.71,56.7 v25.15,56.7
DN
  Top 0.127: 162.69,53.39 162.81,53.27 163.45,53.27 J2.B7 | 162.69,53.39 162.69,53.9 162.94,54.16 163.45,54.16 J2.A7 | 162.69,53.39 156.84,53.39 153.16,49.71 152.53,49.71 D1.1
DP
  Top 0.127: J2.A6 163.58,53.77 164.08,53.77 164.34,54.03 164.34,54.28 164.08,54.54 163.58,54.54 J2.B6 163.45,54.54 156.08,54.54 151.64,50.09 151.64,48.19 152.02,47.8 152.4,47.8 D1.3
EPD_3V3  (via drill 0.3)
  Top 0.127: v13.97,99.88 10.79,99.88 C7.1 | v56.77,71.68 58.17,71.68 TP17.TP | v82.3,13.51 82.3,14.28 J3.16 | 87.76,29.14 86.87,30.02 L1.2 | 87.76,29.14 v88.14,28.76 | v135.13,48.57 138.05,51.49 Q3.2 | v121.92,44.38 110.49,44.38 97.41,31.3 95.12,31.3 95,31.42 90.04,31.42 87.76,29.14
  Bottom 0.127: v13.97,99.88 28.57,99.88 v56.77,71.68 56.77,71.05 71.75,56.06 71.75,28.25 74.93,25.07 88.14,25.07 | v82.3,13.51 88.14,19.36 88.14,25.07 | v88.14,28.76 88.14,25.07 | v135.13,48.57 126.11,48.57 v121.92,44.38
EPD_3V3_C  (via drill 0.3)
  Top 0.127: v136.14,52.38 136.14,51.62 Q3.1 | v137.92,54.16 137.92,55.68 R_CL1.1 | v56.9,58.85 56.77,58.73 26.67,58.73 20.32,65.08 20.32,65.46 U2.18 | v70.99,56.19 94.74,56.19 v96.52,54.41 | v133.1,18.47 133.1,4.62 TP13.TP
  Bottom 0.127: v137.92,54.16 v136.14,52.38 134.11,54.41 120.65,54.41 | v56.9,58.85 68.33,58.85 v70.99,56.19 | 120.65,54.41 v96.52,54.41 | v133.1,18.47 133.1,26.98 120.65,39.42 120.65,54.41
EPD_BUSY  (via drill 0.3)
  Top 0.127: v86.49,12.5 85.85,13.13 85.85,14.28 J3.9 | v65.02,12.88 64.26,13.64 21.34,13.64 17.91,17.07 TP9.TP 17.78,17.2 6.86,28.12 6.86,49.46 7.49,50.09 v7.49,59.74 | v10.03,62.28 10.03,65.46 U2.26
  Bottom 0.127: v86.49,12.5 83.57,12.5 83.31,12.24 65.66,12.24 v65.02,12.88 | v7.49,59.74 v10.03,62.28
EPD_CS  (via drill 0.3)
  Top 0.127: v20.32,19.1 22.48,16.94 TP10.TP | U2.11 20.32,47.93 v20.32,36.25 29.34,36.25 43.81,21.77 v67.06,21.77 | 84.33,14.66 84.33,14.4 J3.12 84.33,14.66 | 84.33,14.66 83.82,15.17 v83.31,15.17 | v75.95,18.21 75.95,21.01 D11.2 | v145.92,15.04 149.73,11.23 149.73,9.07 149.48,8.82 148.59,8.82 147.95,9.45 147.7,9.45 R9.1 | 84.33,14.66 v84.84,15.17
  Bottom 0.127: v20.32,19.1 v20.32,36.25 | v83.31,15.17 82.55,15.17 82.42,15.04 79.12,15.04 v75.95,18.21 74.93,19.23 69.6,19.23 v67.06,21.77 | v145.92,15.04 89.15,15.04 88.52,15.67 85.34,15.67 v84.84,15.17
EPD_DC  (via drill 0.3)
  Top 0.127: v86.23,11.48 84.84,12.88 84.84,14.28 J3.11 | v115.19,11.23 121.41,5.01 TP11.TP | v41.53,14.4 19.81,36.12 19.81,36.38 19.94,36.5 19.94,41.71 19.81,41.84 18.41,41.84 12.7,47.55 12.7,47.93 U2.5 | v64.77,11.1 65.53,11.1 v65.91,11.48
  Bottom 0.127: v115.19,11.23 114.94,10.97 86.74,10.97 v86.23,11.48 85.98,11.74 67.69,11.74 67.44,11.48 v65.91,11.48 | v41.53,14.4 61.47,14.4 v64.77,11.1
EPD_RST  (via drill 0.3)
  Top 0.127: v86.87,11.48 85.34,13.01 85.34,14.28 J3.10 | v120.14,11.74 127.13,4.75 TP12.TP | v17.27,64.44 16.51,65.2 16.51,65.46 U2.21 | v64.26,31.42 v38.48,57.2 | v87.63,22.41 88.01,22.41 90.3,20.12 v90.3,12.88
  Bottom 0.127: 90.3,11.48 114.81,11.48 115.06,11.74 v120.14,11.74 | 90.3,11.48 v86.87,11.48 | v17.27,64.44 31.24,64.44 v38.48,57.2 | v64.26,31.42 73.03,22.66 87.38,22.66 v87.63,22.41 | 90.3,11.48 v90.3,12.88
FLASH_CS  (via drill 0.3)
  Top 0.127: v145.67,8.82 146.3,9.45 R5.1 | v141.6,12.88 141.6,18.47 142.62,19.48 143.64,19.48 U6.1 | v33.02,42.47 v38.48,37.01 38.48,36.25 D10.2 | v26.92,42.47 21.46,47.93 U2.12
  Bottom 0.127: v145.67,8.82 v141.6,12.88 122.3,12.88 119.89,10.47 66.04,10.47 64.39,12.12 64.14,12.12 39.24,37.01 v38.48,37.01 | v26.92,42.47 v33.02,42.47
GDR  (via drill 0.3)
  Top 0.127: v89.28,13.39 89.28,14.28 J3.2 | v63.88,15.04 63.88,15.93 Q2.1 63.88,16.05 64.52,16.69 65.41,16.69 65.53,16.56 65.53,16.18 66.93,14.78 67.94,14.78 68.58,15.42 R4.2
  Bottom 0.127: v89.28,13.39 88.9,13.39 87.5,11.99 64.9,11.99 64.52,12.37 64.26,12.37 63.88,12.75 v63.88,15.04
GND  (via drill 0.3)
  Top 0.127: 53.09,105.46 51.82,105.46 50.8,106.48 CHANGE_BUTTON.2 50.67,106.61 47.37,106.61 CHANGE_BUTTON.1 | 53.09,105.46 53.21,105.46 53.47,105.72 53.47,106.48 52.83,107.11 52.83,107.37 C10.2 | C25.2 67.69,107.37 68.33,106.73 68.33,105.72 68.07,105.46 66.8,105.46 65.79,106.48 BOOT_BUTTON.2 65.66,106.61 62.36,106.61 BOOT_BUTTON.1 62.23,106.48 58.29,102.54 55.25,102.54 C_DELAY.2 55.12,102.54 54.36,103.3 53.09,103.3 | 53.09,103.3 51.69,103.3 51.56,103.18 51.56,102.8 49.78,101.02 49.53,101.02 IC2.3 | v53.09,105.08 53.09,105.46 | 53.09,103.3 v53.09,103.43 | U2.29_7 14.61,54.16 14.61,55.3 U2.29_8 14.61,55.43 14.61,56.44 U2.29_9 14.48,56.57 13.34,56.57 U2.29_6 13.21,56.57 12.19,56.57 U2.29_3 | U2.29_1 12.19,54.16 13.21,54.16 U2.29_4 | U2.29_2 12.19,55.3 13.21,55.3 U2.29_5 | U2.29_1 12.06,54.16 U2.29_2 | U2.29_3 12.06,56.44 12.06,55.43 U2.29_2 | v7.62,49.58 7.62,48.06 U2.1 | v11.3,53.27 12.06,54.03 U2.29_1 | U2.29_3 12.06,56.57 12.06,59.24 7.62,63.68 7.62,65.46 U2.28 7.62,65.58 7.62,76.89 16.13,85.4 J1.G1 16.13,85.52 16.13,86.54 15.37,87.3 15.37,90.22 16.13,90.98 J1.G2 16.13,91.11 14.48,92.76 14.48,93.14 | 5.59,92.76 5.21,93.14 5.08,93.14 3.05,95.18 3.05,95.43 J1.G4 | 5.59,92.76 2.03,89.21 2.03,82.48 J1.G3 | 5.59,92.76 J1.P6 5.71,92.76 v7.87,92.76 | 14.48,100 14.48,99.11 C6.2 14.48,98.99 14.48,93.14 | 14.48,100 13.34,101.14 10.79,101.14 C7.2 | 14.48,100 15.49,100 21.97,106.48 22.23,106.48 RESET_BUTTON.1 22.35,106.61 25.65,106.61 RESET_BUTTON.2 25.78,106.61 26.29,106.61 27.05,107.37 27.94,107.37 C5.2 28.07,107.37 v28.7,106.73 | 14.48,93.14 v12.95,93.14 | 129.41,52.76 129.79,52.76 C1_BAT.2
  Top 0.127: 129.41,52.76 127.63,54.54 C2_BAT.2 | 122.81,44.63 122.81,41.71 R2_BAT.1 | 122.81,44.63 122.17,45.27 D12.1 | IC1.2 130.94,46.15 130.68,46.15 128.52,44 128.52,42.98 126.49,40.95 123.57,40.95 122.94,41.58 R2_BAT.1 | 129.41,52.76 129.41,52 128.52,51.11 128.52,47.55 127.38,46.41 124.59,46.41 | 122.81,44.63 124.59,46.41 | 141.48,56.95 141.35,57.08 140.59,57.08 U4.6 140.46,57.2 140.21,57.2 139.83,57.58 137.29,57.58 135.13,55.43 132.84,55.43 U1.2 132.72,55.3 130.43,57.58 122.3,57.58 121.79,57.08 121.79,55.17 123.06,53.9 123.06,48.95 124.59,47.42 124.59,46.41 | 141.48,56.95 142.11,57.58 142.49,57.58 U4.4 | 141.48,56.95 U4.9 141.6,56.82 142.24,56.19 142.49,56.19 U4.1 142.62,56.19 151.76,56.19 | TP4.TP 151.89,64.06 151.89,59.62 TP5.TP 151.76,59.49 151.76,56.95 | C5_USB.2 156.84,51.74 157.48,51.11 157.48,49.96 156.21,48.69 154.94,48.69 D1.5 154.94,48.57 154.56,48.57 154.05,48.06 154.05,46.41 154.81,45.65 R2-USB.2 154.81,45.52 153.67,44.38 R2-USB1.1 153.54,44.38 151.13,46.79 151.13,48.82 150.11,49.84 C4_USB.2 150.11,49.96 151.76,51.62 151.76,56.19 | 151.76,56.19 151.76,56.95 | U6.4 143.76,15.8 145.8,15.8 147.57,17.58 U6.9 147.7,17.58 147.83,17.45 165.1,17.45 J4.1 165.23,17.45 165.48,17.45 166.12,18.09 166.12,28.76 154.81,40.06 C3.- 154.81,40.19 163.83,49.2 | J2.B12 163.45,50.47 163.45,50.34 J2.A1 163.58,50.22 163.58,49.46 163.83,49.2 | 163.83,49.2 164.21,48.82 J2.MP3 | J2.MP3 164.34,48.82 168.15,48.82 J2.MP1 168.28,48.82 168.28,58.98 J2.MP2 168.15,58.98 164.34,58.98 J2.MP4 164.21,58.98 163.58,58.35 163.58,57.33 J2.A12 163.45,57.2 163.45,57.08 J2.B1 163.45,56.95 151.76,56.95
  Top 0.127: 163.83,49.2 J2.MP3 | J3.MP2 77.22,11.74 68.96,11.74 66.67,9.45 R2.1 66.55,9.45 65.79,8.69 63.75,8.69 63.5,8.94 63.5,9.07 62.86,9.71 SJ1.1 | J3.MP1 90.8,11.74 90.17,11.74 88.9,10.47 78.61,10.47 77.34,11.74 J3.MP2 | D9.1 36.96,34.72 38.48,34.72 D10.1 | 39.24,30.91 39.12,30.79 38.1,30.79 37.47,31.42 37.21,31.42 C2.2 37.08,31.42 36.58,30.91 35.05,30.91 34.92,31.04 34.92,33.2 35.31,33.58 35.31,34.6 D8.1 | 39.24,30.91 39.24,32.06 38.61,32.69 C1.2 38.48,32.82 38.48,34.6 D10.1 | 35.43,51.36 35.43,47.93 34.8,47.3 34.8,47.04 D6.1 34.8,46.92 39.24,42.47 39.24,35.61 38.61,34.98 38.61,34.72 D10.1 | 35.43,51.36 33.91,52.88 U3.5 33.78,53.01 33.53,53.01 33.02,53.52 33.02,54.16 33.15,54.28 | 33.15,54.28 33.4,54.54 33.78,54.54 U3.7 | 35.43,51.36 36.32,51.36 38.1,53.14 38.1,54.28 37.21,55.17 37.08,55.17 36.83,55.43 U3.1 | 86.11,21.01 86.74,21.01 EPD_C10.2 | 86.11,21.01 85.47,21.01 EPD_C11.2 | 86.11,21.01 86.11,19.23 85.98,19.1 84.84,19.1 84.71,19.23 84.71,20.12 84.45,20.37 84.45,20.5 83.95,21.01 EPD_C9.2 83.82,21.13 83.82,21.52 v83.57,21.77 | 86.11,21.01 86.11,21.9 86.49,22.28 86.99,22.28 88.27,21.01 EPD_C12.2 | EPD_C5.1 78.49,19.74 78.87,20.12 78.87,20.25 79.5,20.88 79.76,20.88 EPD_C6.2 79.88,21.01 81.03,21.01 EPD_C7.2 81.15,21.01 82.3,21.01 | 82.3,21.01 82.42,21.01 EPD_C8.2 | 83.19,16.05 84.96,16.05 86.23,14.78 86.23,14.4 J3.8 | 83.19,16.05 82.17,16.05 81.79,15.67 81.79,14.4 J3.17 81.79,14.28 81.79,13.9 81.53,13.64 78.1,13.64 v77.72,14.02 74.3,17.45 74.3,19.48 73.53,20.25 | 83.19,16.05 83.19,20.12 82.93,20.37 82.93,20.5 82.55,20.88 EPD_C8.2 | 82.3,21.01 v82.3,21.77
  Top 0.127: 82.3,21.01 EPD_C8.2 | 87.12,45.27 88.27,45.27 88.9,45.9 C8.2 89.03,46.03 90.42,47.42 96.52,47.42 96.77,47.68 96.77,49.58 95.63,50.73 C9.2 | 87.12,45.27 85.85,46.54 85.85,48.95 U5.13 | R4.1 67.31,15.55 67.31,17.83 66.67,18.47 66.67,19.36 67.31,19.99 EPD_C2.2 68.71,20.12 EPD_C1.2 68.83,20.25 73.53,20.25 | 74.3,24.06 74.3,21.13 D11.1 74.3,21.01 73.53,20.25 | 74.3,24.06 74.3,25.2 74.55,25.45 74.55,25.58 C1_BAT1.2 75.06,26.09 75.69,26.72 77.98,26.72 80.01,24.69 80.26,24.69 R1_PWRUSB.1 80.39,24.69 82.8,27.1 90.8,27.1 D4.1 90.93,27.1 91.44,26.6 95,26.6 95.12,26.72 95.12,27.61 109.09,41.58 122.81,41.58 R2_BAT.1 | 74.3,24.06 73.15,24.06 72.9,24.31 72.9,25.07 73.53,25.71 73.53,25.96 C1_BAT2.2 73.66,26.09 73.91,26.34 73.91,27.99 | 87.12,45.27 87.12,41.2 73.91,27.99 | 39.24,30.91 70.99,30.91 73.91,27.99 | v77.34,13.13 77.34,11.86 J3.MP2 | 33.15,54.28 v32.51,54.92
  Bottom 0.127: v53.09,103.43 v53.09,105.08 47.88,105.08 46.23,106.73 v28.7,106.73 | v7.62,49.58 v11.3,53.27 16,53.27 17.65,54.92 v32.51,54.92 | v7.87,92.76 8.26,93.14 v12.95,93.14 | v82.3,21.77 v83.57,21.77 | v77.34,13.13 77.34,13.64 v77.72,14.02
  pour Top: 74.72,10.06 74.74,10.08 92.88,10.08 92.9,10.06 92.92,10.04 92.94,10.02 92.94,0.13 92.99,0.08 170.13,0.08 170.18,0.13 170.18,67.12 92.24,67.12 92.22,67.14 92.1,67.26 92.08,67.28 92.08,111.12 73.24,111.12 73.24,108.88 73.22,108.86 73.2,108.84 73.18,108.82 21.04,108.82 21.02,108.84 21,108.86 20.98,108.88 20.98,111.12 0.04,111.12 0.04,0.18 74.58,0.18 74.58,9.92 74.6,9.94
  pour Bottom: 74.72,10.06 74.74,10.08 92.88,10.08 92.9,10.06 92.92,10.04 92.94,10.02 92.94,0.13 92.99,0.08 170.13,0.08 170.18,0.13 170.18,67.12 92.24,67.12 92.22,67.14 92.1,67.26 92.08,67.28 92.08,111.12 73.24,111.12 73.24,108.88 73.22,108.86 73.2,108.84 73.18,108.82 21.04,108.82 21.02,108.84 21,108.86 20.98,108.88 20.98,111.12 0.04,111.12 0.04,0.23 0.09,0.18 74.53,0.18 74.58,0.23 74.58,9.92 74.6,9.94
GPIO8
  Top 0.127: R10.2 19.18,42.6 19.18,47.8 19.05,47.93 U2.10
I2C_PW  (via drill 0.3)
  Top 0.127: 36.07,32.82 35.69,32.82 R1_PINH.2 36.07,32.82 | 36.07,32.82 37.08,32.82 C2.1 37.21,32.82 38.48,31.55 C1.1 | 32,55.04 32,53.77 33.15,52.63 33.15,48.44 R2-PINH.2 33.15,48.31 32.51,47.68 32.51,42.34 36.07,38.79 36.07,32.82 | 32,55.04 32.39,55.43 33.78,55.43 U3.8 33.91,55.55 34.54,54.92 34.54,54.66 | 34.54,54.66 34.54,54.28 34.16,53.9 33.91,53.9 U3.6 | 34.54,54.66 36.7,54.66 U3.2 | v26.8,60 21.59,65.2 21.59,65.46 U2.17 | v29.59,57.2 29.84,57.2 32,55.04
  Bottom 0.127: v29.59,57.2 v26.8,60
INT_RTC  (via drill 0.3)
  Top 0.127: R1-PINH1.1 87.12,60.51 87.12,58.35 U5.3 86.99,58.22 86.99,57.97 86.11,57.08 61.85,57.08 46.74,72.19 TP15.TP 46.61,72.32 45.47,73.46 41.02,73.46 v26.8,59.24 | v25.4,57.84 16.51,48.95 16.51,48.06 U2.8
  Bottom 0.127: v26.8,59.24 v25.4,57.84
IO/BOOT
  Top 0.127: C25.1 67.56,106.22 66.67,107.11 66.67,107.24 65.79,108.13 BOOT_BUTTON.3 65.66,108.13 62.36,108.13 BOOT_BUTTON.4 62.23,108 61.34,107.11 61.34,106.86 60.71,106.22 R_BOOT.1 60.58,106.1 58.93,104.45 53.09,104.45 52.32,105.21 47.5,105.21 47.12,104.83 47.12,97.21 24.13,74.22 24.13,65.58 U2.15
IO/CHANGE
  Top 0.127: C10.1 52.7,106.22 50.8,108.13 CHANGE_BUTTON.3 50.67,108.13 47.37,108.13 CHANGE_BUTTON.4 47.24,108.13 45.34,106.22 44.96,106.22 R_CHANGE.1 44.83,106.1 44.83,97.33 13.97,66.47 13.97,65.58 U2.23
MISO  (via drill 0.3)
  Top 0.127: v121.16,45.52 120.4,45.52 R8.1 120.27,45.65 v103.12,45.65 | v142.75,18.98 143,18.98 143.64,18.34 U6.2 | v34.67,49.46 34.67,48.57 D6.2 | v6.99,93.27 6.48,93.78 5.84,93.78 J1.P7 | v8.13,66.73 8.76,66.09 8.76,65.58 U2.27 8.89,65.46 8.89,62.79 9.91,61.77 10.41,61.77 v17.78,54.41 21.72,58.35 57.4,58.35 61.85,53.9 70.36,53.9 73.41,50.85 v76.2,50.85 | v5.08,37.26 5.08,17.33 TP6.TP
  Bottom 0.127: v121.16,45.52 121.16,40.57 v142.75,18.98 | v34.67,49.46 22.73,49.46 19.56,52.63 | v17.78,54.41 19.56,52.63 | v6.99,93.27 6.99,90.6 6.48,90.1 6.48,68.38 v8.13,66.73 | v5.08,37.26 14.1,46.28 14.1,47.17 19.56,52.63 | v103.12,45.65 97.92,50.85 v76.2,50.85
MOSI  (via drill 0.3)
  Top 0.127: v83.31,13.26 83.31,14.28 J3.14 | v150.88,15.17 151.38,15.67 U6.5 | v8.51,92.64 8.51,99.88 R7.1 | v6.99,89.97 6.48,89.97 5.84,89.33 J1.P3 | v29.97,36.25 35.31,36.25 D8.2 | v16.13,46.92 15.11,47.93 U2.7 15.11,48.06 15.11,48.44 v9.78,53.77 | v9.14,25.2 9.14,17.33 TP7.TP 9.14,17.2 17.91,8.44 66.67,8.44 v69.22,10.97
  Bottom 0.127: v83.31,13.26 88.01,13.26 89.28,14.53 134.24,14.53 | 134.24,14.53 150.24,14.53 v150.88,15.17 | v8.51,92.64 8.51,91.49 v6.99,89.97 6.99,68.51 10.54,64.95 10.54,60.89 9.78,60.12 v9.78,53.77 | v29.97,36.25 26.8,36.25 v16.13,46.92 16,47.04 14.99,47.04 14.61,46.66 14.61,46.41 9.14,40.95 v9.14,25.2 | 134.24,14.53 134.24,13.64 133.73,13.13 122.17,13.13 119.76,10.72 69.47,10.72 v69.22,10.97
N$1
  Top 0.127: J2.A4 163.32,51.11 162.81,51.11 154.69,42.98 144.78,42.98 139.7,48.06 130.68,48.06 126.62,44 PFMF.050.1.1
N$2
  Top 0.127: R2-USB1.2 154.94,44.38 162.69,52.12 162.69,52.5 162.81,52.63 163.45,52.63 J2.A5
N$3
  Top 0.127: R2-USB.1 153.54,45.65 153.29,45.65 151.38,47.55 151.38,50.22 156.72,55.55 163.45,55.55 J2.B5
N$4
  Top 0.127: C1_BAT1.1 75.06,24.56 75.82,24.56 76.2,24.18 Q1.2 76.33,24.06 79.25,24.06 80.39,22.91 100.58,22.91 117.6,39.93 127.25,39.93 130.94,43.61 130.94,45.27 IC1.3 131.06,45.39 131.44,45.77 131.57,45.77 131.7,45.9 | 131.7,45.9 131.7,46.66 131.06,47.3 IC1.1 | 131.7,45.9 132.84,44.76 136.53,44.76 D2.1
N$5  (via drill 0.3)
  Top 0.127: v78.36,16.44 78.36,14.4 J3.24 | v84.2,18.85 87.5,18.85 88.27,19.61 EPD_C12.1
  Bottom 0.127: v78.36,16.44 80.39,18.47 83.82,18.47 v84.2,18.85
N$6
  Top 0.127: J3.23 78.87,14.4 78.87,16.94 77.09,18.72 77.09,21.26 78.36,22.53 83.57,22.53 84.71,21.39 84.71,20.5 85.47,19.74 EPD_C11.1
N$7
  Top 0.127: C4.1 96.77,30.53 96.77,29.64 94.36,27.23 D4.2 94.23,27.23 90.93,30.53 90.93,30.79 D3.1
N$8
  Top 0.127: R2_BAT.2 124.21,41.71 124.21,44.5 125.86,46.15 127.51,46.15 131.19,49.84 131.19,53.52 130.3,54.41 U1.5
N$9  (via drill 0.3)
  Top 0.127: v79.38,16.18 79.38,14.4 J3.22 | v86.61,21.77 87.12,21.77 87.5,21.39 87.5,20.37 86.87,19.74 EPD_C10.1
  Bottom 0.127: v79.38,16.18 79.38,17.07 80.52,18.21 84.2,18.21 86.61,20.63 v86.61,21.77
N$10
  Top 0.127: J3.21 79.88,14.4 79.88,16.31 77.34,18.85 77.34,21.13 78.49,22.28 82.42,22.28 83.19,21.52 83.19,20.5 83.95,19.74 EPD_C9.1
N$11
  Top 0.127: CHG_LED.C 126.49,56.31 125.22,56.31 124.59,55.68 123.32,55.68 122.68,56.31 R1_BAT.1
N$12
  Top 0.127: R1_BAT.2 123.95,56.44 124.97,56.44 125.6,57.08 127,57.08 127.38,56.7 127.38,55.93 128.02,55.3 131.7,55.3 132.46,54.54 132.72,54.54 U1.1
N$13
  Top 0.127: J3.20 80.39,14.4 80.39,17.96 79.12,19.23 79.12,20.12 79.25,20.25 81.91,20.25 82.42,19.74 EPD_C8.1
N$14
  Top 0.127: J3.19 80.77,14.4 80.77,19.36 81.03,19.61 EPD_C7.1
N$15  (via drill 0.3)
  Top 0.127: v81.28,18.98 81.28,14.4 J3.18 | v80.26,18.98 80.26,19.23 79.88,19.61 EPD_C6.1
  Bottom 0.127: v80.26,18.98 v81.28,18.98
N$16
  Top 0.127: IC2.5 52.32,102.8 53.47,102.8 55.12,101.14 C_DELAY.1
N$17  (via drill 0.3)
  Top 0.127: v82.3,15.55 82.8,15.04 82.8,14.4 J3.15 | v79.88,16.94 77.6,19.23 77.6,20.25 78.36,21.01 EPD_C5.2
  Bottom 0.127: v82.3,15.55 81.28,15.55 v79.88,16.94
N$18  (via drill 0.3)
  Top 0.127: v86.49,18.34 87.76,17.07 87.76,14.4 J3.5 | v69.72,19.74 69.47,19.48 68.2,19.48 67.56,18.85 EPD_C2.1
  Bottom 0.127: v86.49,18.34 86.49,20.12 87.12,20.75 87.12,21.9 86.61,22.41 72.39,22.41 v69.72,19.74
N$19  (via drill 0.3)
  Top 0.127: v88.39,15.17 88.39,14.4 J3.4 | v73.79,18.72 68.83,18.72 EPD_C1.1
  Bottom 0.127: v88.39,15.17 85.6,15.17 84.2,13.77 83.19,13.77 82.42,13.01 79.5,13.01 v73.79,18.72
N$21  (via drill 0.3)
  Top 0.127: v88.9,61.39 88.9,62.16 D7.1 | v88.9,55.68 95,49.58 96.27,49.58 96.52,49.33 96.52,47.8 96.39,47.68 93.73,47.68 92.96,48.44 R_CAPACITOR.1
  Bottom 0.127: v88.9,55.68 v88.9,61.39
RESE  (via drill 0.3)
  Top 0.127: v80.64,11.23 80.9,10.97 86.99,10.97 88.77,12.75 88.77,14.28 J3.3 | v67.82,11.23 67.18,11.23 66.42,11.99 64.39,11.99 R3.2 64.39,12.12 v64.39,12.88 | v65.02,14.4 65.02,15.93 Q2.2
  Bottom 0.127: v80.64,11.23 70.74,11.23 70.48,11.48 68.07,11.48 v67.82,11.23 | v65.02,14.4 65.02,13.51 v64.39,12.88
RESE'
  Top 0.127: 64.9,10.34 64.39,9.83 SJ1.2 64.9,10.34 | 64.9,10.34 65.28,10.72 66.55,10.72 R2.2 | 64.9,10.34 64.77,10.34 63.12,11.99 R3.1
RESET  (via drill 0.3)
  Top 0.127: v19.81,106.86 20.45,106.22 R14.1 | v21.08,108.26 21.97,108.26 22.23,108 RESET_BUTTON.4 22.35,108 25.65,108 RESET_BUTTON.3 | v26.8,106.22 27.94,106.22 C5.1 | v47.62,104.7 49.4,102.92 IC2.1 | v10.29,60 8.51,58.22 8.51,52.12 10.03,50.6 10.03,48.06 U2.3
  Bottom 0.127: 21.08,108.13 v19.81,106.86 13.46,100.51 13.46,63.43 10.29,60.25 v10.29,60 | 21.08,108.13 22.99,106.22 v26.8,106.22 28.32,104.7 v47.62,104.7 | 21.08,108.13 v21.08,108.26
RTC_RST
  Top 0.127: U2.16 22.86,65.46 23.37,64.95 23.37,64.82 23.62,64.57 31.75,64.57 40.89,73.71 49.15,73.71 63.25,59.62 84.84,59.62 85.72,58.73 85.72,58.35 U5.4
RX  (via drill 0.3)
  Top 0.127: v41.53,94.67 12.7,65.84 12.7,65.58 U2.24 | v76.07,94.67 84.71,103.3 TP2.TP
  Bottom 0.127: v76.07,94.67 v41.53,94.67
SCK  (via drill 0.3)
  Top 0.127: U6.6 151.38,16.94 150.37,15.93 150.37,9.32 149.35,8.31 145.54,8.31 145.03,8.82 145.03,9.45 R6.1 144.91,9.58 137.92,9.58 v133.73,13.77 | v79.12,12.75 83.44,12.75 83.82,13.13 83.82,14.28 J3.13 | v37.72,37.01 36.96,36.25 D9.2 | v15.11,46.54 13.97,47.68 13.97,47.93 U2.6 13.84,48.06 13.84,48.44 v9.78,52.5 | v4.7,91.24 4.95,91.49 5.71,91.49 J1.P5 | v16.51,17.2 13.72,17.2 TP8.TP
  Bottom 0.127: v15.11,46.54 15.88,46.54 30.73,31.68 | 30.73,31.68 36.58,31.68 37.72,32.82 v37.72,37.01 38.23,37.52 42.55,37.52 67.56,12.5 77.47,12.5 77.72,12.75 v79.12,12.75 83.44,12.75 83.69,13.01 88.14,13.01 89.03,13.9 89.41,13.9 89.53,13.77 v133.73,13.77 | v4.7,91.24 4.7,67.74 6.99,65.46 6.99,55.3 v9.78,52.5 | v16.51,17.2 19.05,17.2 30.73,28.88 30.73,31.68
SCL  (via drill 0.3)
  Top 0.127: v34.04,50.34 34.04,48.06 33.27,47.3 33.27,47.04 R2-PINH.1 | v36.07,52.38 36.7,53.01 U3.4 | v18.54,63.93 17.78,64.7 17.78,65.46 U2.20 | v31.62,53.27 v27.69,57.2 | v146.05,49.84 139.95,55.93 139.95,56.44 140.08,56.57 140.46,56.57 U4.7 | v163.58,22.02 165.1,20.5 J4.4 | U5.16 89.53,49.08 89.53,54.16 v88.27,55.43 88.01,55.68 v61.72,55.68
  Bottom 0.127: v36.07,52.38 34.29,50.6 | 34.29,50.6 v34.04,50.34 | 25.15,57.33 25.27,57.2 v27.69,57.2 | 25.15,57.33 v18.54,63.93 | 34.29,50.6 v31.62,53.27 | v163.58,22.02 163.58,42.22 155.96,49.84 v146.05,49.84 140.46,55.43 137.54,55.43 137.16,55.04 126.11,55.04 125.48,55.68 122.3,55.68 121.79,55.17 88.77,55.17 88.52,55.43 v88.27,55.43 | 25.15,57.33 24.64,56.82 24.64,56.57 25.53,55.68 v61.72,55.68
SDA  (via drill 0.3)
  Top 0.127: v146.18,50.47 140.59,56.06 U4.8 | v164.08,20.12 164.72,19.48 165.1,19.48 J4.3 | v36.45,32.18 36.32,32.18 35.69,31.55 R1_PINH.1 | v37.59,53.27 37.08,53.77 36.83,53.77 U3.3 | v19.05,61.77 19.05,65.46 U2.19 | v64.01,50.34 86.49,50.34 | 86.49,50.34 87.38,50.34 88.27,49.46 88.27,49.08 U5.15 | v86.87,46.28 86.87,47.55 86.49,47.93 86.49,50.34
  Bottom 0.127: v146.18,50.47 155.7,50.47 164.08,42.09 v164.08,20.12 144.53,20.12 140.34,15.93 117.22,15.93 v86.87,46.28 | 36.45,50.34 36.45,52.12 36.7,52.38 | 36.45,50.34 v36.45,32.18 | v37.59,53.27 36.7,52.38 | v19.05,61.77 25.4,55.43 33.66,55.43 36.7,52.38 | 36.45,50.34 v64.01,50.34
SRC  (via drill 0.3)
  Top 0.127: 87.12,34.72 86.36,35.49 D5.2 | 87.12,34.72 89.92,31.93 96.77,31.93 C4.2 | v73.41,27.23 64.52,18.34 64.52,18.09 Q2.3 | v75.56,27.23 79.5,27.23 82.3,30.02 | 87.12,34.72 82.42,30.02 82.3,30.02 | 82.3,30.02 L1.1
  Bottom 0.127: v75.56,27.23 v73.41,27.23
SS_SD  (via drill 0.3)
  Top 0.127: J1.P2 6.35,88.19 6.86,87.68 6.86,64.06 10.79,60.12 10.79,59.87 9.27,58.35 9.27,52.38 11.3,50.34 11.3,48.06 U2.4 11.43,47.93 11.43,43.87 41.4,13.9 77.22,13.9 80.39,10.72 88.77,10.72 105.41,27.36 126.49,27.36 | 126.49,27.36 143.64,10.21 148.08,10.21 148.72,9.58 148.97,9.58 R22.1 | v126.49,39.17 126.49,27.36 | v121.28,46.15 122.05,46.92 D12.2
  Bottom 0.127: v126.49,39.17 121.41,44.25 121.41,45.14 121.67,45.39 121.67,45.77 v121.28,46.15
TX  (via drill 0.3)
  Top 0.127: v41.53,95.94 11.43,65.84 11.43,65.58 U2.25 | v72.64,95.94 79.88,103.18 TP1.TP
  Bottom 0.127: v72.64,95.94 v41.53,95.94
USB_D+  (via drill 0.3)
  Top 0.127: v157.48,49.33 155.96,47.8 154.94,47.8 D1.4 | v72.26,51.36 62.74,51.36 56.13,57.97 27.43,57.97 24.13,54.66 24.13,48.06 U2.14
  Bottom 0.127: v157.48,49.33 157.23,49.33 144.65,61.9 82.8,61.9 v72.26,51.36
USB_D-  (via drill 0.3)
  Top 0.127: v153.42,48.69 154.31,49.58 154.94,49.58 D1.6 | v129.03,43.11 126.62,40.69 v108.84,40.69 | v83.82,46.79 49.53,46.79 38.61,57.71 27.56,57.71 24.77,54.92 24.77,47.17 24.64,47.04 23.62,47.04 22.73,47.93 U2.13
  Bottom 0.127: v153.42,48.69 149.86,48.69 144.27,43.11 v129.03,43.11 | v108.84,40.69 93.09,40.69 86.99,46.79 v83.82,46.79
VBAT  (via drill 0.3)
  Top 0.127: U4.2 142.62,56.7 142.62,57.08 U4.3 142.62,57.2 142.88,57.2 143.13,57.46 143.13,57.97 143,58.09 134.49,58.09 132.84,56.44 U1.3 132.72,56.44 131.32,57.84 126.24,57.84 | v78.1,25.96 78.23,25.83 78.23,25.2 Q1.3 | 126.24,57.84 122.17,57.84 111.76,47.42 v100.71,47.42 100.71,52.38 88.9,64.19 88.9,103.05 TP3.TP | v126.24,55.55 126.24,54.66 C2_BAT.1 | 126.24,57.84 v126.24,58.09
  Bottom 0.127: v78.1,25.96 78.1,41.71 83.82,47.42 v100.71,47.42 | v126.24,58.09 v126.24,55.55
VBUS  (via drill 0.3)
  Top 0.127: U1.4 130.18,56.44 128.14,56.44 CHG_LED.A 128.02,56.44 127.13,57.33 122.43,57.33 122.05,56.95 122.05,55.3 126.49,50.85 126.49,48.44 PFMF.050.1.2 126.62,48.31 126.62,48.06 v127.51,47.17 | C5_USB.1 156.72,50.47 154.56,50.47 v153.42,49.33 152.78,48.69 152.53,48.69 D1.2 | 137.67,52.25 143,52.25 146.56,48.69 149.99,48.69 C4_USB.1 | 137.67,52.25 137.03,52.25 136.4,52.88 133.22,52.88 131.06,55.04 129.54,55.04 129.41,54.92 129.41,54.03 129.54,53.9 129.79,53.9 130.56,53.14 130.56,52.12 129.92,51.49 C1_BAT.1 | v137.41,47.55 136.91,47.04 136.65,47.04 D2.2 | 137.67,52.25 v137.67,52.38 | 77.47,24.82 76.33,25.96 Q1.1 | 77.47,24.82 77.85,24.44 79.25,24.44 79.76,23.93 80.9,23.93 81.53,24.56 R1_PWRUSB.2 81.66,24.69 93.47,24.69 108.97,40.19 126.49,40.19 127.25,40.95 v127.51,40.95 | v61.98,54.41 44.32,72.06 41.53,72.06 TP14.TP | 77.47,24.82 v77.22,24.56
  Bottom 0.127: 137.41,49.33 137.41,52.12 v137.67,52.38 | 137.41,49.33 v137.41,47.55 136.53,46.66 134.75,46.66 134.24,47.17 v127.51,47.17 v127.51,40.95 | 137.41,49.33 v153.42,49.33 | v61.98,54.41 61.98,53.01 71.5,43.49 71.5,28.12 75.06,24.56 v77.22,24.56
VRTC
  Top 0.127: C9.1 95.5,48.69 94.49,49.71 92.96,49.71 R_CAPACITOR.2 92.84,49.71 91.82,49.71 89.79,47.68 87.63,47.68 | 87.63,47.68 87.63,48.44 87.12,48.95 U5.14 | 87.63,47.68 87.63,46.03 C8.1
VUSB
  Top 0.127: J2.B9 163.58,51.74 164.08,51.74 164.59,52.25 164.59,55.55 164.08,56.06 163.58,56.06 J2.B4 163.45,56.19 163.45,56.44 J2.A9